# Altium PCB PCB_LED-Matrix.PcbDoc
Units mm, origin at the board's own origin, x right, y up, seen from the top; angles counter-clockwise.
Board outline 133 x 79 mm, 2 copper layers (Top-Layer, Bottom-Layer); 100 components, 50 nets, 299 pads, 144 vias.
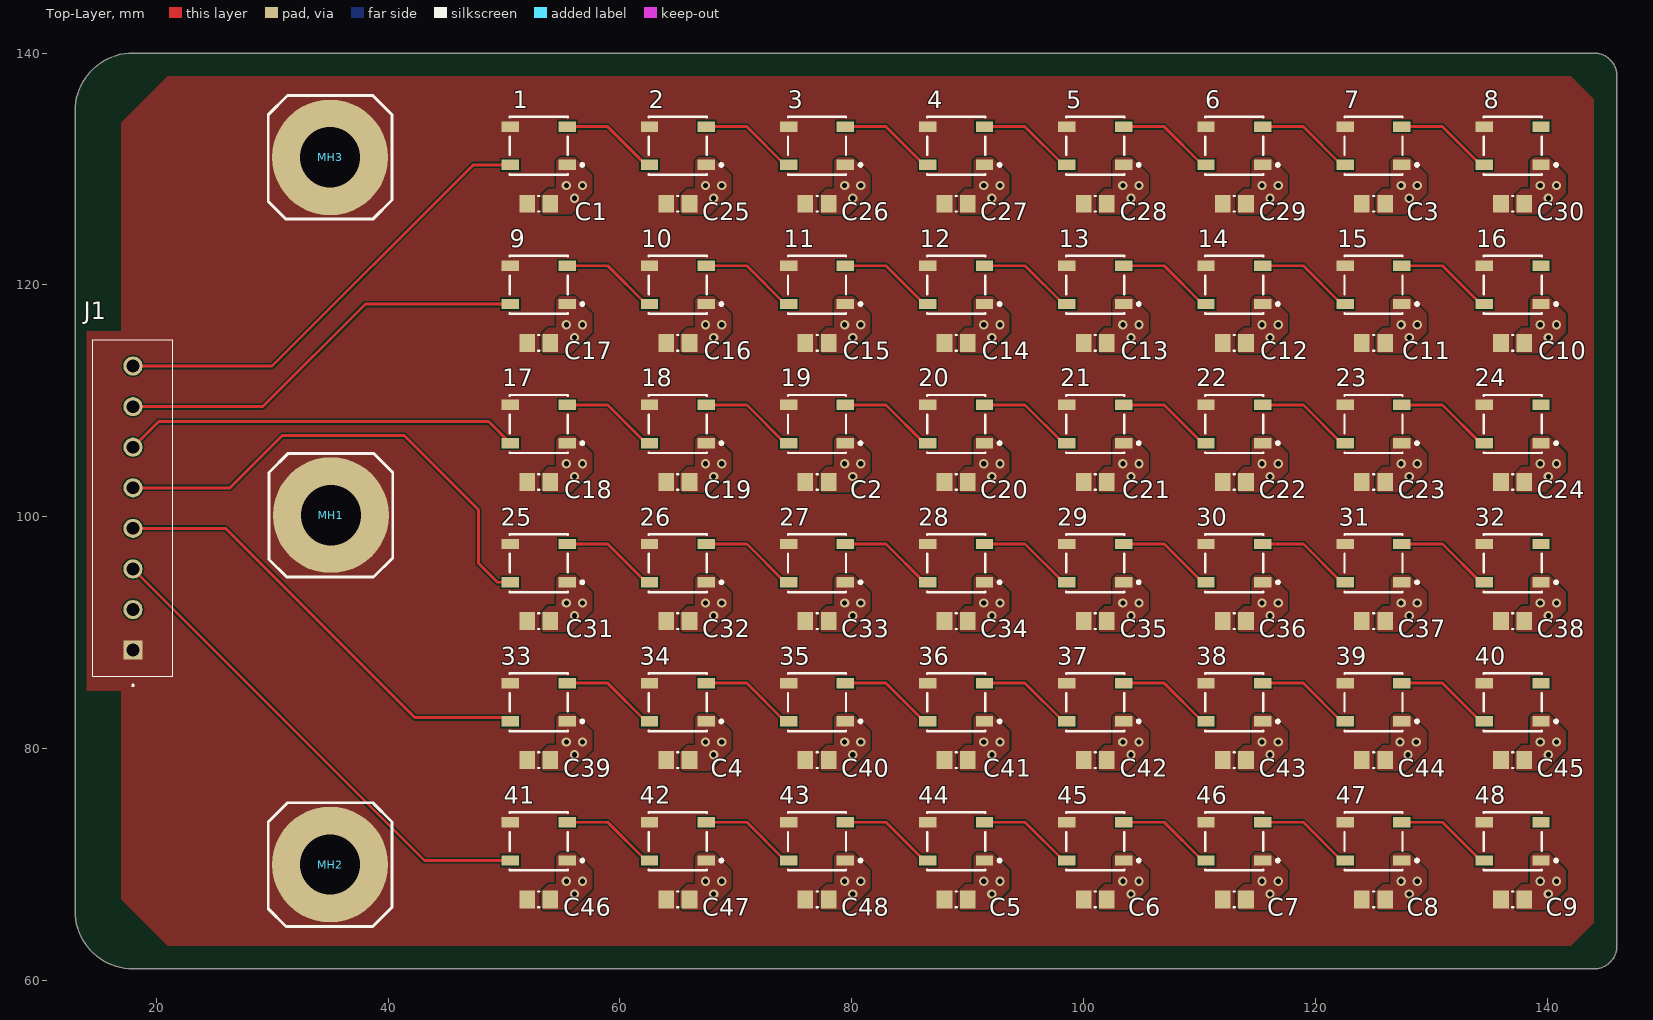
[diagram p0: Top-Layer view]
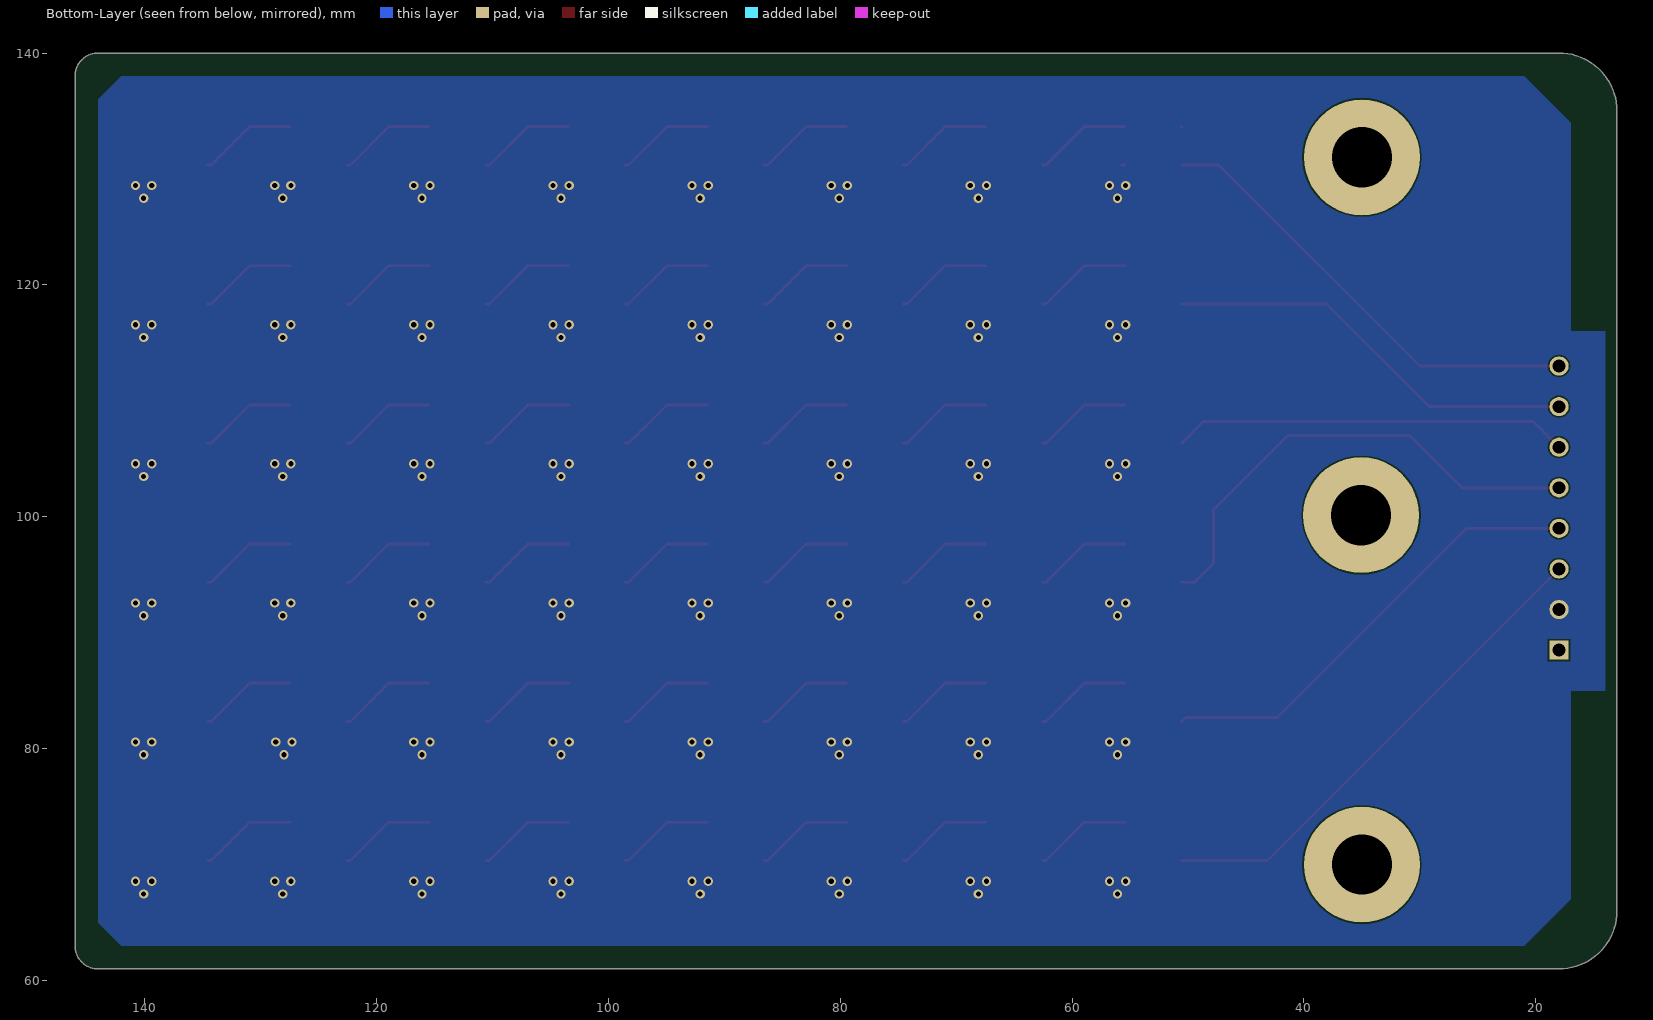
[diagram p1: Bottom-Layer view, seen from below]
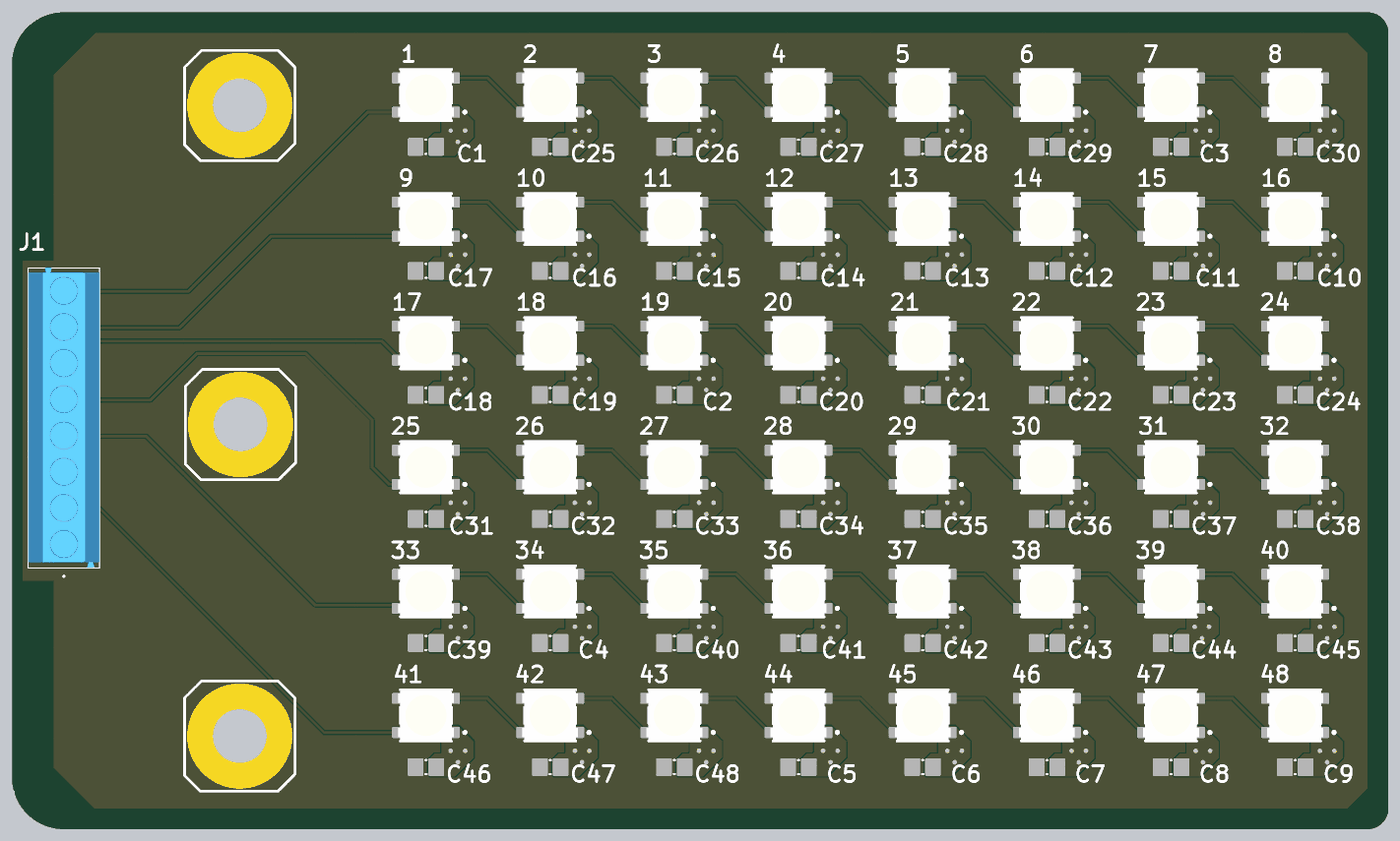
[diagram p2: 3D render of the assembled board from above, using the file's embedded part models]

## Layer stack, top to bottom
Top Solder: solder mask 0.0102, Solder Resist, Dk 3.5
Top-Layer: signal copper 0.009
Dielectric 1: dielectric 0.32, FR-4, Dk 4.8
Bottom-Layer: signal copper 0.009
Bottom Solder: solder mask 0.0102, Solder Resist, Dk 3.5

## Board outline
13,66 13,135 cw(c18,135) 18,140 144,140 cw(c144,138) 146,138 146,63 cw(c144,63) 144,61 18,61 cw(c18,66)

## Design rules (kind name [scope] priority, off if disabled: settings)
Clearance [All] p1: gap=0.125 ignorepadtopadclearanceinfootprint=FALSE
HoleSize HoleSizeVia [IsVia] p1: absolutevalues=TRUE maxlimit=0.45 minlimit=0.25 maxpercent=80.000 minpercent=20.000
HoleSize HoleSizePTH [IsPad] p2: absolutevalues=TRUE maxlimit=5.6 minlimit=0.5 maxpercent=80.000 minpercent=20.000
HoleToHoleClearance [All] p1: gap=0.3 allowstackedmicrovias=TRUE
MinimumAnnularRing MinimumAnnularRingVias [All] p1: minimumring=0.1
MinimumAnnularRing MinimumAnnularRingGeneral [All] p2: minimumring=0.3
MinimumSolderMaskSliver [All] p1: minsoldermaskwidth=0.08
PasteMaskExpansion [All] p1: expansion=0.085
PolygonConnect [All] p1: connectstyle=Direct reliefconductorwidth=0.254 reliefentries=4 polygonreliefangle="90 Angle" airgapwidth=0.254
RoutingVias [All] p1: holewidth=0.35 width=0.55 viastyle="Through Hole" minholewidth=0.3 minwidth=0.5 maxholewidth=0.45 maxwidth=0.65
SilkToSilkClearance SilkToSilkClerance [All] p1: silktosilkclearance=0.125
SilkToSolderMaskClearance [IsPad] p1: minsilkscreentomaskgap=0.125 clearancetoexposedcopper=TRUE
SolderMaskExpansion SolderMaskExpansionVia [IsVia] p1: expansion=0.1 istentingtop=TRUE useseparateexpansions=TRUE expansionbottom=0.1 istentingbottom=TRUE
SolderMaskExpansion [All] p2: expansion=0.075 istentingtop=FALSE
SupplyNets "Schematic Supply Nets_1" [InNet('GND')] p1: voltage=0.000
SupplyNets "Schematic Supply Nets" [InNet('+5')] p2: voltage=0.000
UnRoutedNet [All] p1: checkbadconnections=TRUE
Width [All] p1: maxlimit=2.54 minlimit=0.125 preferedwidth=0.254
23 further rules are at their usual default settings.

## Components (designator, comment, footprint, x,y, rotation, side; value= is the part's Value field where it differs from the comment)
1 "1655" ADA-RGB-1655_V 53,132 r180 top
2 "1655" ADA-RGB-1655_V 65,132 r180 top
3 "1655" ADA-RGB-1655_V 77,132 r180 top
4 "1655" ADA-RGB-1655_V 89,132 r180 top
5 "1655" ADA-RGB-1655_V 101,132 r180 top
6 "1655" ADA-RGB-1655_V 113,132 r180 top
7 "1655" ADA-RGB-1655_V 125,132 r180 top
8 "1655" ADA-RGB-1655_V 137,132 r180 top
9 "1655" ADA-RGB-1655_V 53,120 r180 top
10 "1655" ADA-RGB-1655_V 65,120 r180 top
11 "1655" ADA-RGB-1655_V 77,120 r180 top
12 "1655" ADA-RGB-1655_V 89,120 r180 top
13 "1655" ADA-RGB-1655_V 101,120 r180 top
14 "1655" ADA-RGB-1655_V 113,120 r180 top
15 "1655" ADA-RGB-1655_V 125,120 r180 top
16 "1655" ADA-RGB-1655_V 137,120 r180 top
17 "1655" ADA-RGB-1655_V 53,108 r180 top
18 "1655" ADA-RGB-1655_V 65,108 r180 top
19 "1655" ADA-RGB-1655_V 77,108 r180 top
20 "1655" ADA-RGB-1655_V 89,108 r180 top
21 "1655" ADA-RGB-1655_V 101,108 r180 top
22 "1655" ADA-RGB-1655_V 113,108 r180 top
23 "1655" ADA-RGB-1655_V 125,108 r180 top
24 "1655" ADA-RGB-1655_V 137,108 r180 top
25 "1655" ADA-RGB-1655_V 53,96 r180 top
26 "1655" ADA-RGB-1655_V 65,96 r180 top
27 "1655" ADA-RGB-1655_V 77,96 r180 top
28 "1655" ADA-RGB-1655_V 89,96 r180 top
29 "1655" ADA-RGB-1655_V 101,96 r180 top
30 "1655" ADA-RGB-1655_V 113,96 r180 top
31 "1655" ADA-RGB-1655_V 125,96 r180 top
32 "1655" ADA-RGB-1655_V 137,96 r180 top
33 "1655" ADA-RGB-1655_V 53,84 r180 top
34 "1655" ADA-RGB-1655_V 65,84 r180 top
35 "1655" ADA-RGB-1655_V 77,84 r180 top
36 "1655" ADA-RGB-1655_V 89,84 r180 top
37 "1655" ADA-RGB-1655_V 101,84 r180 top
38 "1655" ADA-RGB-1655_V 113,84 r180 top
39 "1655" ADA-RGB-1655_V 125,84 r180 top
40 "1655" ADA-RGB-1655_V 137,84 r180 top
41 "1655" ADA-RGB-1655_V 53,72 r180 top
42 "1655" ADA-RGB-1655_V 65,72 r180 top
43 "1655" ADA-RGB-1655_V 77,72 r180 top
44 "1655" ADA-RGB-1655_V 89,72 r180 top
45 "1655" ADA-RGB-1655_V 101,72 r180 top
46 "1655" ADA-RGB-1655_V 113,72 r180 top
47 "1655" ADA-RGB-1655_V 125,72 r180 top
48 "1655" ADA-RGB-1655_V 137,72 r180 top
C1 "100nF" CAPC0805(2012)100_M 53,127 r180 top
C2 "100nF" CAPC0805(2012)100_M 77,103 r180 top
C3 "100nF" CAPC0805(2012)100_M 125,127 r180 top
C4 "100nF" CAPC0805(2012)100_M 65,79 r180 top
C5 "100nF" CAPC0805(2012)100_M 89,67 r180 top
C6 "100nF" CAPC0805(2012)100_M 101,67 r180 top
C7 "100nF" CAPC0805(2012)100_M 113,67 r180 top
C8 "100nF" CAPC0805(2012)100_M 125,67 r180 top
C9 "100nF" CAPC0805(2012)100_M 137,67 r180 top
C10 "100nF" CAPC0805(2012)100_M 137,115 r180 top
C11 "100nF" CAPC0805(2012)100_M 125,115 r180 top
C12 "100nF" CAPC0805(2012)100_M 113,115 r180 top
C13 "100nF" CAPC0805(2012)100_M 101,115 r180 top
C14 "100nF" CAPC0805(2012)100_M 89,115 r180 top
C15 "100nF" CAPC0805(2012)100_M 77,115 r180 top
C16 "100nF" CAPC0805(2012)100_M 65,115 r180 top
C17 "100nF" CAPC0805(2012)100_M 53,115 r180 top
C18 "100nF" CAPC0805(2012)100_M 53,103 r180 top
C19 "100nF" CAPC0805(2012)100_M 65,103 r180 top
C20 "100nF" CAPC0805(2012)100_M 89,103 r180 top
C21 "100nF" CAPC0805(2012)100_M 101,103 r180 top
C22 "100nF" CAPC0805(2012)100_M 113,103 r180 top
C23 "100nF" CAPC0805(2012)100_M 125,103 r180 top
C24 "100nF" CAPC0805(2012)100_M 137,103 r180 top
C25 "100nF" CAPC0805(2012)100_M 65,127 r180 top
C26 "100nF" CAPC0805(2012)100_M 77,127 r180 top
C27 "100nF" CAPC0805(2012)100_M 89,127 r180 top
C28 "100nF" CAPC0805(2012)100_M 101,127 r180 top
C29 "100nF" CAPC0805(2012)100_M 113,127 r180 top
C30 "100nF" CAPC0805(2012)100_M 137,127 r180 top
C31 "100nF" CAPC0805(2012)100_M 53,91 r180 top
C32 "100nF" CAPC0805(2012)100_M 65,91 r180 top
C33 "100nF" CAPC0805(2012)100_M 77,91 r180 top
C34 "100nF" CAPC0805(2012)100_M 89,91 r180 top
C35 "100nF" CAPC0805(2012)100_M 101,91 r180 top
C36 "100nF" CAPC0805(2012)100_M 113,91 r180 top
C37 "100nF" CAPC0805(2012)100_M 125,91 r180 top
C38 "100nF" CAPC0805(2012)100_M 137,91 r180 top
C39 "100nF" CAPC0805(2012)100_M 53,79 r180 top
C40 "100nF" CAPC0805(2012)100_M 77,79 r180 top
C41 "100nF" CAPC0805(2012)100_M 89,79 r180 top
C42 "100nF" CAPC0805(2012)100_M 101,79 r180 top
C43 "100nF" CAPC0805(2012)100_M 113,79 r180 top
C44 "100nF" CAPC0805(2012)100_M 125,79 r180 top
C45 "100nF" CAPC0805(2012)100_M 137,79 r180 top
C46 "100nF" CAPC0805(2012)100_M 53,67 r180 top
C47 "100nF" CAPC0805(2012)100_M 65,67 r180 top
C48 "100nF" CAPC0805(2012)100_M 77,67 r180 top
J1 "TB0011-350-08BE" TB0011-350-08BE 18,88.5 r270 top
MH1 "MountingHole" MTH 35.071,100.135 r0 top
MH2 "MountingHole" MTH 35,70 r0 top
MH3 "MountingHole" MTH 35,131 r0 top

## Footprints (in the part's own frame and the unit in brackets; to place one, negate y for a bottom-side part, rotate by r counter-clockwise, add the part's x,y. Pads: shape width x height; smd on the part's side, far side on the other; paste and mask are expansions set on the pad)
ADA-RGB-1655_V [mm] "SMD, 4-Leads, Body 5x5mm"
  rect 1.5x0.9 smd: 1(-2.45,1.65) 2(-2.45,-1.65) 3(2.45,-1.65) 4(2.45,1.65)
  silkscreen extent -3.88,-2.5 2.5,2.5, body extent -2.7,-2.5 2.7,2.5, height 1.68
CAPC0805(2012)100_M [mm] "Chip Capacitor, Body 2.0x1.2mm, Height 1.0mm, IPC Low Density"
  rect 1.35x1.55 smd: 1(-1,0) 2(1,0)
  silkscreen extent -0.05,-0.67 0.05,0.67, body extent -1.1,-0.72 1.1,0.72, height 1
MTH [mm]
  round 10 hole 5.2: 1(0,0)
  silkscreen extent -5.33,-5.33 5.33,5.33
TB0011-350-08BE [mm]
  rect 1.65x1.65 hole 1.1: 1(0,0)
  round 1.65 hole 1.1: 2(-3.5,0) 3(-7,0) 4(-10.5,0) 5(-14,0) 6(-17.5,0) 7(-21,0) 8(-24.5,0)
  silkscreen extent -26.75,-3.45 3.1,3.45, body extent -26.82,-3.45 2.18,3.45, height 8.5

## Part data
1 2 3 4 5 6 7 8 9 10 11 12 13 14 15 16 17 18 19 20 21 22 23 24 25 26 27 28 29 30 31 32 33 34 35 36 37 38 39 40 41 42 43 44 45 46 47 48: library part CMP-2000-05026-1, "Intelligent Control LED Integrated Light Source, 3.5 to 5.3 V, -25 to 80 degC, 4-Pin SMD, RoHS, Tape and Reel", Color=Red,Green,Blue(RGB), Manufacturer=Adafruit-Industries-LLC, Package Description="4-Pin Surface Mount Device, Body 5 x 5 mm", Category=Optoelectronics, Configuration=Discrete, Controller Type=-, Datasheet URL=http://datasheet.octopart.com/ADA1655-Adafruit-Industries-datasheet-32028139.pdf, Datasheet Version=May-13, Family=Addressable,Specialty, Interface=-, Manufacturer URL=https://www.adafruit.com/, Mounting Type=SurfaceMount, Number of LEDs=10, Package Reference=1655, Series=Neopixel, Size / Dimension=5.00mmLx5.00mmW, Utilized LED=WS2812(5050)
C1 C2 C3 C4 C5 C6 C7 C8 C9 C10 C11 C12 C13 C14 C15 C16 C17 C18 C19 C20 C21 C22 C23 C24 C25 C26 C27 C28 C29 C30 C31 C32 C33 C34 C35 C36 C37 C38 C39 C40 C41 C42 C43 C44 C45 C46 C47 C48: library part CMP-1036-04393-1, "CAP 100nF 10V ±5% 0805 (2012 Metric) Thickness 1mm SMD", Case-EIA=0805, Case-Metric=2012, Rated Voltage="10 V", Tolerance=Â±5%, Max Thickness="1 mm", Technology=SMT
J1: "Connector", Manufacturer_Name="Same Sky", Datasheet Link=https://www.sameskydevices.com/product/resource/tb0011-350.pdf, Height=8.5mm, Manufacturer_Part_Number=TB0011-350-08BE

## Via types
v1: diameter 0.8, hole 0.45, Top-Layer to Bottom-Layer, tented both sides, 144 vias

## Nets (pads, with @x,y where several pads share a name; then routed paths per layer and width w, separated by ;. In a path a pad name is that pad's centre, name@x,y a point inside that pad or via, vN(x,y) a via of type N, cw(c..) or ccw(c..) an arc to the next point about the centre after c; other vN are vias at no path point)
+5: 1.1 2.1 3.1 4.1 5.1 6.1 7.1 8.1 9.1 10.1 11.1 12.1 13.1 14.1 15.1 16.1 17.1 18.1 19.1 20.1 21.1 22.1 23.1 24.1 25.1 26.1 27.1 28.1 29.1 30.1 31.1 32.1 33.1 34.1 35.1 36.1 37.1 38.1 39.1 40.1 41.1 42.1 43.1 44.1 45.1 46.1 47.1 48.1 C1.1 C2.1 C3.1 C4.1 C5.1 C6.1 C7.1 C8.1 C9.1 C10.1 C11.1 C12.1 C13.1 C14.1 C15.1 C16.1 C17.1 C18.1 C19.1 C20.1 C21.1 C22.1 C23.1 C24.1 C25.1 C26.1 C27.1 C28.1 C29.1 C30.1 C31.1 C32.1 C33.1 C34.1 C35.1 C36.1 C37.1 C38.1 C39.1 C40.1 C41.1 C42.1 C43.1 C44.1 C45.1 C46.1 C47.1 C48.1 J1.2 | length 0.6
  Top-Layer w0.254: 1.1 1.1@55.75,130.35 ; v1@56.587,128.764 v1(56.781,128.57)
  other v1: 56.081,67.47 68.081,67.47 80.081,67.47 92.081,67.47 104.081,67.47 116.081,67.47 128.081,67.47 140.081,67.47 55.381,68.57 56.781,68.57 67.381,68.57 68.781,68.57 79.381,68.57 80.781,68.57 91.381,68.57 92.781,68.57 103.381,68.57 104.781,68.57 115.381,68.57 116.781,68.57 127.381,68.57 128.781,68.57 139.381,68.57 140.781,68.57 56.081,79.47 68.081,79.47 80.081,79.47 92.081,79.47 104.081,79.47 116.081,79.47 127.981,79.47 140.081,79.47 55.381,80.57 56.781,80.57 67.381,80.57 68.781,80.57 79.381,80.57 80.781,80.57 91.381,80.57 92.781,80.57 103.381,80.57 104.781,80.57 115.381,80.57 116.781,80.57 127.281,80.57 128.681,80.57 139.381,80.57 140.781,80.57 56.081,91.47 68.081,91.47 80.081,91.47 92.081,91.47 104.081,91.47 116.081,91.47 128.081,91.47 140.081,91.47 55.381,92.57 56.781,92.57 67.381,92.57 68.781,92.57 79.381,92.57 80.781,92.57 91.381,92.57 92.781,92.57 103.381,92.57 104.781,92.57 115.381,92.57 116.781,92.57 127.381,92.57 128.781,92.57 139.381,92.57 140.781,92.57 56.081,103.47 68.081,103.47 80.081,103.47 92.081,103.47 104.081,103.47 116.081,103.47 128.081,103.47 140.081,103.47 55.381,104.57 56.781,104.57 67.381,104.57 68.781,104.57 79.381,104.57 80.781,104.57 91.381,104.57 92.781,104.57 103.381,104.57 104.781,104.57 115.381,104.57 116.781,104.57 127.381,104.57 128.781,104.57 139.381,104.57 140.781,104.57 56.081,115.47 68.081,115.47 80.081,115.47 92.081,115.47 104.081,115.47 116.081,115.47 128.081,115.47 140.081,115.47 55.381,116.57 56.781,116.57 67.381,116.57 68.781,116.57 79.381,116.57 80.781,116.57 91.381,116.57 92.781,116.57 103.381,116.57 104.781,116.57 115.381,116.57 116.781,116.57 127.381,116.57 128.781,116.57 139.381,116.57 140.781,116.57 56.081,127.47 68.081,127.47 80.081,127.47 92.081,127.47 104.081,127.47 116.081,127.47 128.081,127.47 140.081,127.47 55.381,128.57 67.381,128.57 68.781,128.57 79.381,128.57 80.781,128.57 91.381,128.57 92.781,128.57 103.381,128.57 104.781,128.57 115.381,128.57 116.781,128.57 127.381,128.57 128.781,128.57 139.381,128.57 140.781,128.57
GND: 1.3 2.3 3.3 4.3 5.3 6.3 7.3 8.3 9.3 10.3 11.3 12.3 13.3 14.3 15.3 16.3 17.3 18.3 19.3 20.3 21.3 22.3 23.3 24.3 25.3 26.3 27.3 28.3 29.3 30.3 31.3 32.3 33.3 34.3 35.3 36.3 37.3 38.3 39.3 40.3 41.3 42.3 43.3 44.3 45.3 46.3 47.3 48.3 C1.2 C2.2 C3.2 C4.2 C5.2 C6.2 C7.2 C8.2 C9.2 C10.2 C11.2 C12.2 C13.2 C14.2 C15.2 C16.2 C17.2 C18.2 C19.2 C20.2 C21.2 C22.2 C23.2 C24.2 C25.2 C26.2 C27.2 C28.2 C29.2 C30.2 C31.2 C32.2 C33.2 C34.2 C35.2 C36.2 C37.2 C38.2 C39.2 C40.2 C41.2 C42.2 C43.2 C44.2 C45.2 C46.2 C47.2 C48.2 J1.1 MH1.1 MH2.1 MH3.1 | length 0.1
  Top-Layer w0.254: 1.3@50.508,133.608 1.3
Net1_2: 1.2 2.4 | length 8.5
  Top-Layer w0.254: 1.2 58.95,133.65 61.927,130.673 62.25,130.35 2.4
Net1_4: 1.4 J1.8 | length 39.7
  Top-Layer w0.254: J1.8 30,113 47.35,130.35 1.4
Net2_2: 2.2 3.4 | length 8.5
  Top-Layer w0.254: 2.2 70.95,133.65 74.25,130.35 3.4
Net3_2: 3.2 4.4 | length 8.5
  Top-Layer w0.254: 3.2 82.95,133.65 86.25,130.35 4.4
Net4_2: 4.2 5.4 | length 8.5
  Top-Layer w0.254: 4.2 94.95,133.65 98.25,130.35 5.4
Net5_2: 5.2 6.4 | length 8.5
  Top-Layer w0.254: 5.2 106.95,133.65 110.25,130.35 6.4
Net6_2: 6.2 7.4 | length 8.5
  Top-Layer w0.254: 6.2 118.95,133.65 122.25,130.35 7.4
Net7_2: 7.2 8.4 | length 8.5
  Top-Layer w0.254: 7.2 130.95,133.65 134.25,130.35 8.4
Net9_2: 9.2 10.4 | length 8.5
  Top-Layer w0.254: 9.2 58.95,121.65 62.25,118.35 10.4
Net9_4: 9.4 J1.7 | length 36.2
  Top-Layer w0.254: J1.7 29.2,109.5 38.05,118.35 9.4
Net10_2: 10.2 11.4 | length 8.5
  Top-Layer w0.254: 10.2 70.95,121.65 74.25,118.35 11.4
Net11_2: 11.2 12.4 | length 8.5
  Top-Layer w0.254: 11.2 82.95,121.65 86.25,118.35 12.4
Net12_2: 12.2 13.4 | length 8.5
  Top-Layer w0.254: 12.2 94.95,121.65 98.25,118.35 13.4
Net13_2: 13.2 14.4 | length 8.5
  Top-Layer w0.254: 13.2 106.95,121.65 110.25,118.35 14.4
Net14_2: 14.2 15.4 | length 8.5
  Top-Layer w0.254: 14.2 118.95,121.65 122.25,118.35 15.4
Net15_2: 15.2 16.4 | length 8.5
  Top-Layer w0.254: 15.2 130.95,121.65 134.25,118.35 16.4
Net17_2: 17.2 18.4 | length 8.5
  Top-Layer w0.254: 17.2 58.95,109.65 62.25,106.35 18.4
Net17_4: 17.4 J1.6 | length 34.2
  Top-Layer w0.254: J1.6 20.2,108.2 48.7,108.2 17.4
Net18_2: 18.2 19.4 | length 8.5
  Top-Layer w0.254: 18.2 70.95,109.65 74.25,106.35 19.4
Net19_2: 19.2 20.4 | length 8.5
  Top-Layer w0.254: 19.2 82.95,109.65 86.25,106.35 20.4
Net20_2: 20.2 21.4 | length 8.5
  Top-Layer w0.254: 20.2 94.95,109.65 98.25,106.35 21.4
Net21_2: 21.2 22.4 | length 8.5
  Top-Layer w0.254: 21.2 106.95,109.65 110.25,106.35 22.4
Net22_2: 22.2 23.4 | length 8.5
  Top-Layer w0.254: 22.2 118.95,109.65 122.25,106.35 23.4
Net23_2: 23.2 24.4 | length 8.5
  Top-Layer w0.254: 23.2 130.95,109.65 134.25,106.35 24.4
Net25_2: 25.2 26.4 | length 8.5
  Top-Layer w0.254: 25.2 58.95,97.65 62.25,94.35 26.4
Net25_4: 25.4 J1.5 | length 42.4
  Top-Layer w0.254: J1.5 26.369,102.5 30.869,107 41.4,107 47.8,100.6 47.8,95.982 49.432,94.35 25.4
Net26_2: 26.2 27.4 | length 8.5
  Top-Layer w0.254: 26.2 70.95,97.65 74.25,94.35 27.4
Net27_2: 27.2 28.4 | length 8.5
  Top-Layer w0.254: 27.2 82.95,97.65 86.25,94.35 28.4
Net28_2: 28.2 29.4 | length 8.5
  Top-Layer w0.254: 28.2 94.95,97.65 98.25,94.35 29.4
Net29_2: 29.2 30.4 | length 8.5
  Top-Layer w0.254: 29.2 106.95,97.65 110.25,94.35 30.4
Net30_2: 30.2 31.4 | length 8.5
  Top-Layer w0.254: 30.2 118.95,97.65 122.25,94.35 31.4
Net31_2: 31.2 32.4 | length 8.5
  Top-Layer w0.254: 31.2 130.95,97.65 134.25,94.35 32.4
Net33_2: 33.2 34.4 | length 8.5
  Top-Layer w0.254: 33.2 58.95,85.65 62.25,82.35 34.4
Net33_4: 33.4 J1.4 | length 39.4
  Top-Layer w0.254: J1.4 25.989,99 42.316,82.673 50.227,82.673 33.4
Net34_2: 34.2 35.4 | length 8.5
  Top-Layer w0.254: 34.2 70.95,85.65 74.25,82.35 35.4
Net35_2: 35.2 36.4 | length 8.5
  Top-Layer w0.254: 35.2 82.95,85.65 86.25,82.35 36.4
Net36_2: 36.2 37.4 | length 8.5
  Top-Layer w0.254: 36.2 94.95,85.65 98.25,82.35 37.4
Net37_2: 37.2 38.4 | length 8.5
  Top-Layer w0.254: 37.2 106.95,85.65 110.25,82.35 38.4
Net38_2: 38.2 39.4 | length 8.5
  Top-Layer w0.254: 38.2 118.95,85.65 122.25,82.35 39.4
Net39_2: 39.2 40.4 | length 8.5
  Top-Layer w0.254: 39.2 130.95,85.65 134.25,82.35 40.4
Net41_2: 41.2 42.4 | length 8.5
  Top-Layer w0.254: 41.2 58.95,73.65 62.25,70.35 42.4
Net41_4: 41.4 J1.3 | length 43
  Top-Layer w0.254: J1.3 43.15,70.35 41.4
Net42_2: 42.2 43.4 | length 8.5
  Top-Layer w0.254: 42.2 70.95,73.65 74.25,70.35 43.4
Net43_2: 43.2 44.4 | length 8.5
  Top-Layer w0.254: 43.2 82.95,73.65 86.25,70.35 44.4
Net44_2: 44.2 45.4 | length 8.5
  Top-Layer w0.254: 44.2 94.95,73.65 98.25,70.35 45.4
Net45_2: 45.2 46.4 | length 8.5
  Top-Layer w0.254: 45.2 106.95,73.65 110.25,70.35 46.4
Net46_2: 46.2 47.4 | length 8.5
  Top-Layer w0.254: 46.2 118.95,73.65 122.25,70.35 47.4
Net47_2: 47.2 48.4 | length 8.5
  Top-Layer w0.254: 47.2 130.95,73.65 134.25,70.35 48.4
pads on no net: 8.2 16.2 24.2 32.2 40.2 48.2

## Polygon pours and split planes (outlines as drawn)
+5 on Bottom-Layer "Bottom-Layer-+5" (solid, pour order 123): 142,138 144,136 144,65 142,63 21,63 17,67 17,85 14,85 14,116 17,116 17,134 21,138
GND on Top-Layer "Top-Layer-GND" (solid, pour order 165): 142,138 144,136 144,65 142,63 21,63 17,67 17,85 14,85 14,116 17,116 17,134 21,138
+5 on Top-Layer "+5_L01_P120" (solid, pour order 120): 138.5,70.7 138.8,71 140.1,71 141.6,69.5 141.6,67.9 139.8,66.1 137.4,66.1 137.2,66.3 137.2,67.7 137.8,68.3 138.4,68.3 138.5,68.4
+5 on Top-Layer "+5_L01_P119" (solid, pour order 119): 126.5,70.7 126.8,71 128.1,71 129.6,69.5 129.6,67.9 127.8,66.1 125.4,66.1 125.2,66.3 125.2,67.7 125.8,68.3 126.4,68.3 126.5,68.4
+5 on Top-Layer "+5_L01_P118" (solid, pour order 118): 114.5,70.7 114.8,71 116.1,71 117.6,69.5 117.6,67.9 115.8,66.1 113.4,66.1 113.2,66.3 113.2,67.7 113.8,68.3 114.4,68.3 114.5,68.4
+5 on Top-Layer "+5_L01_P117" (solid, pour order 117): 102.5,70.7 102.8,71 104.1,71 105.6,69.5 105.6,67.9 103.8,66.1 101.4,66.1 101.2,66.3 101.2,67.7 101.8,68.3 102.4,68.3 102.5,68.4
+5 on Top-Layer "+5_L01_P116" (solid, pour order 116): 90.5,70.7 90.8,71 92.1,71 93.6,69.5 93.6,67.9 91.8,66.1 89.4,66.1 89.2,66.3 89.2,67.7 89.8,68.3 90.4,68.3 90.5,68.4
+5 on Top-Layer "+5_L01_P115" (solid, pour order 115): 78.5,70.7 78.8,71 80.1,71 81.6,69.5 81.6,67.9 79.8,66.1 77.4,66.1 77.2,66.3 77.2,67.7 77.8,68.3 78.4,68.3 78.5,68.4
+5 on Top-Layer "+5_L01_P114" (solid, pour order 114): 66.5,70.7 66.8,71 68.1,71 69.6,69.5 69.6,67.9 67.8,66.1 65.4,66.1 65.2,66.3 65.2,67.7 65.8,68.3 66.4,68.3 66.5,68.4
+5 on Top-Layer "+5_L01_P113" (solid, pour order 113): 54.5,70.7 54.8,71 56.1,71 57.6,69.5 57.6,67.9 55.8,66.1 53.4,66.1 53.2,66.3 53.2,67.7 53.8,68.3 54.4,68.3 54.5,68.4
+5 on Top-Layer "+5_L01_P112" (solid, pour order 112): 138.5,82.7 138.8,83 140.1,83 141.6,81.5 141.6,79.9 139.8,78.1 137.4,78.1 137.2,78.3 137.2,79.7 137.8,80.3 138.4,80.3 138.5,80.4
+5 on Top-Layer "+5_L01_P111" (solid, pour order 111): 126.5,82.7 126.8,83 128.1,83 129.6,81.5 129.6,79.9 127.8,78.1 125.4,78.1 125.2,78.3 125.2,79.7 125.8,80.3 126.4,80.3 126.5,80.4
+5 on Top-Layer "+5_L01_P110" (solid, pour order 110): 114.5,82.7 114.8,83 116.1,83 117.6,81.5 117.6,79.9 115.8,78.1 113.4,78.1 113.2,78.3 113.2,79.7 113.8,80.3 114.4,80.3 114.5,80.4
+5 on Top-Layer "+5_L01_P109" (solid, pour order 109): 102.5,82.7 102.8,83 104.1,83 105.6,81.5 105.6,79.9 103.8,78.1 101.4,78.1 101.2,78.3 101.2,79.7 101.8,80.3 102.4,80.3 102.5,80.4
+5 on Top-Layer "+5_L01_P108" (solid, pour order 108): 90.5,82.7 90.8,83 92.1,83 93.6,81.5 93.6,79.9 91.8,78.1 89.4,78.1 89.2,78.3 89.2,79.7 89.8,80.3 90.4,80.3 90.5,80.4
+5 on Top-Layer "+5_L01_P107" (solid, pour order 107): 78.5,82.7 78.8,83 80.1,83 81.6,81.5 81.6,79.9 79.8,78.1 77.4,78.1 77.2,78.3 77.2,79.7 77.8,80.3 78.4,80.3 78.5,80.4
+5 on Top-Layer "+5_L01_P106" (solid, pour order 106): 66.5,82.7 66.8,83 68.1,83 69.6,81.5 69.6,79.9 67.8,78.1 65.4,78.1 65.2,78.3 65.2,79.7 65.8,80.3 66.4,80.3 66.5,80.4
+5 on Top-Layer "+5_L01_P105" (solid, pour order 105): 54.5,82.7 54.8,83 56.1,83 57.6,81.5 57.6,79.9 55.8,78.1 53.4,78.1 53.2,78.3 53.2,79.7 53.8,80.3 54.4,80.3 54.5,80.4
+5 on Top-Layer "+5_L01_P104" (solid, pour order 104): 138.5,94.7 138.8,95 140.1,95 141.6,93.5 141.6,91.9 139.8,90.1 137.4,90.1 137.2,90.3 137.2,91.7 137.8,92.3 138.4,92.3 138.5,92.4
+5 on Top-Layer "+5_L01_P103" (solid, pour order 103): 126.5,94.7 126.8,95 128.1,95 129.6,93.5 129.6,91.9 127.8,90.1 125.4,90.1 125.2,90.3 125.2,91.7 125.8,92.3 126.4,92.3 126.5,92.4
+5 on Top-Layer "+5_L01_P102" (solid, pour order 102): 114.5,94.7 114.8,95 116.1,95 117.6,93.5 117.6,91.9 115.8,90.1 113.4,90.1 113.2,90.3 113.2,91.7 113.8,92.3 114.4,92.3 114.5,92.4
+5 on Top-Layer "+5_L01_P101" (solid, pour order 101): 102.5,94.7 102.8,95 104.1,95 105.6,93.5 105.6,91.9 103.8,90.1 101.4,90.1 101.2,90.3 101.2,91.7 101.8,92.3 102.4,92.3 102.5,92.4
+5 on Top-Layer "+5_L01_P100" (solid, pour order 100): 90.5,94.7 90.8,95 92.1,95 93.6,93.5 93.6,91.9 91.8,90.1 89.4,90.1 89.2,90.3 89.2,91.7 89.8,92.3 90.4,92.3 90.5,92.4
+5 on Top-Layer "+5_L01_P099" (solid, pour order 99): 78.5,94.7 78.8,95 80.1,95 81.6,93.5 81.6,91.9 79.8,90.1 77.4,90.1 77.2,90.3 77.2,91.7 77.8,92.3 78.4,92.3 78.5,92.4
+5 on Top-Layer "+5_L01_P098" (solid, pour order 98): 66.5,94.7 66.8,95 68.1,95 69.6,93.5 69.6,91.9 67.8,90.1 65.4,90.1 65.2,90.3 65.2,91.7 65.8,92.3 66.4,92.3 66.5,92.4
+5 on Top-Layer "+5_L01_P097" (solid, pour order 97): 54.5,94.7 54.8,95 56.1,95 57.6,93.5 57.6,91.9 55.8,90.1 53.4,90.1 53.2,90.3 53.2,91.7 53.8,92.3 54.4,92.3 54.5,92.4
+5 on Top-Layer "+5_L01_P096" (solid, pour order 96): 138.5,130.7 138.8,131 140.1,131 141.6,129.5 141.6,127.9 139.8,126.1 137.4,126.1 137.2,126.3 137.2,127.7 137.8,128.3 138.4,128.3 138.5,128.4
+5 on Top-Layer "+5_L01_P095" (solid, pour order 95): 126.5,130.7 126.8,131 128.1,131 129.6,129.5 129.6,127.9 127.8,126.1 125.4,126.1 125.2,126.3 125.2,127.7 125.8,128.3 126.4,128.3 126.5,128.4
+5 on Top-Layer "+5_L01_P094" (solid, pour order 94): 114.5,130.7 114.8,131 116.1,131 117.6,129.5 117.6,127.9 115.8,126.1 113.4,126.1 113.2,126.3 113.2,127.7 113.8,128.3 114.4,128.3 114.5,128.4
+5 on Top-Layer "+5_L01_P093" (solid, pour order 93): 102.5,130.7 102.8,131 104.1,131 105.6,129.5 105.6,127.9 103.8,126.1 101.4,126.1 101.2,126.3 101.2,127.7 101.8,128.3 102.4,128.3 102.5,128.4
+5 on Top-Layer "+5_L01_P092" (solid, pour order 92): 90.5,130.7 90.8,131 92.1,131 93.6,129.5 93.6,127.9 91.8,126.1 89.4,126.1 89.2,126.3 89.2,127.7 89.8,128.3 90.4,128.3 90.5,128.4
+5 on Top-Layer "+5_L01_P091" (solid, pour order 91): 78.5,130.7 78.8,131 80.1,131 81.6,129.5 81.6,127.9 79.8,126.1 77.4,126.1 77.2,126.3 77.2,127.7 77.8,128.3 78.4,128.3 78.5,128.4
+5 on Top-Layer "+5_L01_P090" (solid, pour order 90): 66.5,130.7 66.8,131 68.1,131 69.6,129.5 69.6,127.9 67.8,126.1 65.4,126.1 65.2,126.3 65.2,127.7 65.8,128.3 66.4,128.3 66.5,128.4
+5 on Top-Layer "+5_L01_P089" (solid, pour order 89): 138.5,106.7 138.8,107 140.1,107 141.6,105.5 141.6,103.9 139.8,102.1 137.4,102.1 137.2,102.3 137.2,103.7 137.8,104.3 138.4,104.3 138.5,104.4
+5 on Top-Layer "+5_L01_P088" (solid, pour order 88): 126.5,106.7 126.8,107 128.1,107 129.6,105.5 129.6,103.9 127.8,102.1 125.4,102.1 125.2,102.3 125.2,103.7 125.8,104.3 126.4,104.3 126.5,104.4
+5 on Top-Layer "+5_L01_P087" (solid, pour order 87): 114.5,106.7 114.8,107 116.1,107 117.6,105.5 117.6,103.9 115.8,102.1 113.4,102.1 113.2,102.3 113.2,103.7 113.8,104.3 114.4,104.3 114.5,104.4
+5 on Top-Layer "+5_L01_P086" (solid, pour order 86): 102.5,106.7 102.8,107 104.1,107 105.6,105.5 105.6,103.9 103.8,102.1 101.4,102.1 101.2,102.3 101.2,103.7 101.8,104.3 102.4,104.3 102.5,104.4
+5 on Top-Layer "+5_L01_P085" (solid, pour order 85): 90.5,106.7 90.8,107 92.1,107 93.6,105.5 93.6,103.9 91.8,102.1 89.4,102.1 89.2,102.3 89.2,103.7 89.8,104.3 90.4,104.3 90.5,104.4
+5 on Top-Layer "+5_L01_P084" (solid, pour order 84): 78.5,106.7 78.8,107 80.1,107 81.6,105.5 81.6,103.9 79.8,102.1 77.4,102.1 77.2,102.3 77.2,103.7 77.8,104.3 78.4,104.3 78.5,104.4
+5 on Top-Layer "+5_L01_P083" (solid, pour order 83): 66.5,106.7 66.8,107 68.1,107 69.6,105.5 69.6,103.9 67.8,102.1 65.4,102.1 65.2,102.3 65.2,103.7 65.8,104.3 66.4,104.3 66.5,104.4
+5 on Top-Layer "+5_L01_P082" (solid, pour order 82): 54.5,106.7 54.8,107 56.1,107 57.6,105.5 57.6,103.9 55.8,102.1 53.4,102.1 53.2,102.3 53.2,103.7 53.8,104.3 54.4,104.3 54.5,104.4
+5 on Top-Layer "+5_L01_P081" (solid, pour order 81): 54.5,118.7 54.8,119 56.1,119 57.6,117.5 57.6,115.9 55.8,114.1 53.4,114.1 53.2,114.3 53.2,115.7 53.8,116.3 54.4,116.3 54.5,116.4
+5 on Top-Layer "+5_L01_P080" (solid, pour order 80): 66.5,118.7 66.8,119 68.1,119 69.6,117.5 69.6,115.9 67.8,114.1 65.4,114.1 65.2,114.3 65.2,115.7 65.8,116.3 66.4,116.3 66.5,116.4
+5 on Top-Layer "+5_L01_P079" (solid, pour order 79): 78.5,118.7 78.8,119 80.1,119 81.6,117.5 81.6,115.9 79.8,114.1 77.4,114.1 77.2,114.3 77.2,115.7 77.8,116.3 78.4,116.3 78.5,116.4
+5 on Top-Layer "+5_L01_P078" (solid, pour order 78): 90.5,118.7 90.8,119 92.1,119 93.6,117.5 93.6,115.9 91.8,114.1 89.4,114.1 89.2,114.3 89.2,115.7 89.8,116.3 90.4,116.3 90.5,116.4
+5 on Top-Layer "+5_L01_P077" (solid, pour order 77): 102.5,118.7 102.8,119 104.1,119 105.6,117.5 105.6,115.9 103.8,114.1 101.4,114.1 101.2,114.3 101.2,115.7 101.8,116.3 102.4,116.3 102.5,116.4
+5 on Top-Layer "+5_L01_P076" (solid, pour order 76): 114.5,118.7 114.8,119 116.1,119 117.6,117.5 117.6,115.9 115.8,114.1 113.4,114.1 113.2,114.3 113.2,115.7 113.8,116.3 114.4,116.3 114.5,116.4
+5 on Top-Layer "+5_L01_P075" (solid, pour order 75): 126.5,118.7 126.8,119 128.1,119 129.6,117.5 129.6,115.9 127.8,114.1 125.4,114.1 125.2,114.3 125.2,115.7 125.8,116.3 126.4,116.3 126.5,116.4
+5 on Top-Layer "+5_L01_P074" (solid, pour order 74): 138.5,118.7 138.8,119 140.1,119 141.6,117.5 141.6,115.9 139.8,114.1 137.4,114.1 137.2,114.3 137.2,115.7 137.8,116.3 138.4,116.3 138.5,116.4
+5 on Top-Layer "+5_L01_P073" (solid, pour order 73): 54.5,130.7 54.8,131 56.1,131 57.6,129.5 57.6,127.9 55.8,126.1 53.4,126.1 53.2,126.3 53.2,127.7 53.8,128.3 54.4,128.3 54.5,128.4

## Silkscreen, mask and mechanical layers (free items; w line width, h text height)
Mechanical 1:
  the board outline again, w0.254